# EAGLE board blinkmusb_b1_1side (EAGLE 5.11)
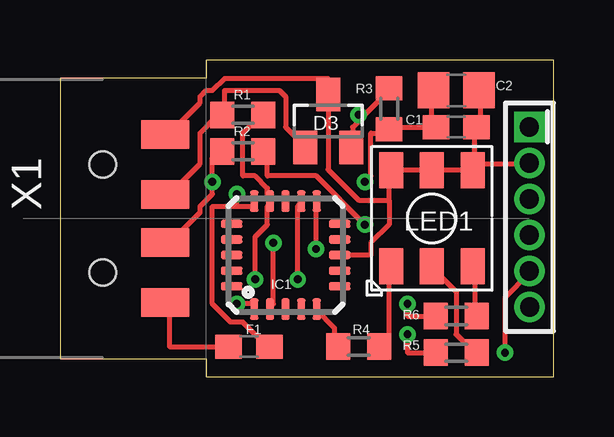
[diagram p0: board, top side]
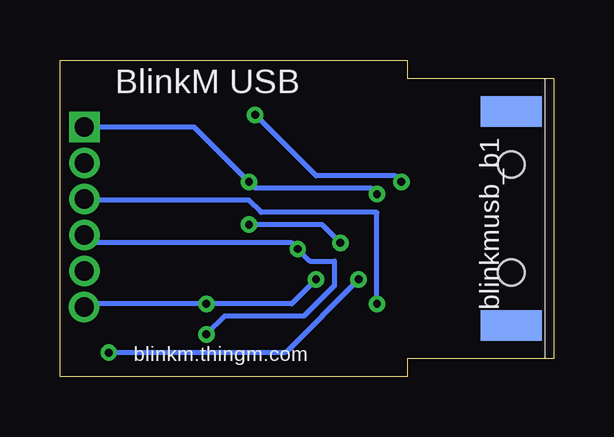
[diagram p1: board, bottom side, seen from below]

Size 20.57 x 13.21 mm. Coordinates in mm from the lower left corner, seen from the top.
Outline: 0,0.76 6.1,0.76 6.1,0 20.57,0 20.57,0.76 20.57,12.45 20.57,13.21 13.72,13.21 6.1,13.21 6.1,12.45 0,12.45 0,0.76
Copper layers (1*16): Top 0.0356mm / dielectric 1.5011mm / Bottom 0.0356mm
Design rules "LaenPCBOrder *": minimum track width 8mil, minimum drill 13mil, track to track 6mil, track to pad 8mil, pad to pad 8mil, via to via 8mil, smd to smd 6mil, copper to edge 15mil, drill to drill 8mil, minimum pad ring 7mil, minimum via ring 7mil, stop-mask expansion 4mil, vias tented up to drill 25mil, thermal gap 10mil
tRestrict: area -6.6,0 to 3.6,12.7
bRestrict: area -6.6,0 to 3.6,12.7

## Footprints (pad centres in the part's own frame; a part is rotated, then mirrored left to right if it is on the bottom)
C0603 = smd 1.1 x 1: 1 -0.85,0; 2 0.85,0
C0805 = smd 1.3 x 1.5: 1 -0.95,0; 2 0.95,0
SOT23 = smd 1 x 1.4: 1 -0.95,-1.1; 2 0.95,-1.1; 3 0,1.1
0603 = smd 1.1 x 1: 1 -0.85,0; 2 0.85,0
MLF20 = smd 0.9 x 0.35: 1 -2.25,1.3; 2 -2.25,0.65; 3 -2.25,0; 4 -2.25,-0.65; 5 -2.25,-1.3; 11 2.25,-1.3; 12 2.25,-0.65; 13 2.25,0; 14 2.25,0.65; 15 2.25,1.3 | smd 0.35 x 0.9: 6 -1.3,-2.25; 7 -0.65,-2.25; 8 0,-2.25; 9 0.65,-2.25; 10 1.3,-2.25; 16 1.3,2.25; 17 0.65,2.25; 18 0,2.25; 19 -0.65,2.25; 20 -1.3,2.25
LED_5050 = smd 1 x 1.5: P$1 1.7,2; P$2 0,2; P$3 -1.7,2; P$4 -1.7,-2; P$5 0,-2; P$6 1.7,-2
R0603 = smd 1 x 1.1: 1 -0.85,0; 2 0.85,0
AVR_MINI_PROG = drill 0.8 pad 1.27 square: 1 0,0 | drill 0.8 pad 1.27 round: 2 1.5,0; 3 3,0; 4 4.5,0; 5 6,0; 6 7.5,0.01
MOLEX-48037-1000 = smd 2 x 1.2: 1 2.6,-3.5; 2 2.6,-1; 3 2.6,1; 4 2.6,3.5 | smd 2.54 x 1.27 bottom: P$1 0,4.45; P$2 0,-4.45 | hole 1.1: 0,2.25; 0,-2.25

## Placement (x,y rotation side)
C1  [C0603]  16.51,10.41 0 top
C2  10uF  [C0805]  16.51,11.94 0 top
D3  [SOT23]  11.18,10.67 0 top
F1  PTC0603  [0603]  7.87,1.27 0 top
IC1  ATTINY45MLF  [MLF20]  9.4,5.08 90 top
LED1  LED_RGB_5050  [LED_5050]  15.49,6.6 180 top
R1  68  [R0603]  7.62,10.92 180 top
R2  68  [R0603]  7.62,9.4 180 top
R3  1k5  [R0603]  13.72,11.18 90 top
R4  100  [R0603]  12.45,1.27 0 top
R5  100  [R0603]  16.51,1.02 0 top
R6  60  [R0603]  16.51,2.54 0 top
U$1  AVR_MINI_PROGSMD  [AVR_MINI_PROG]  19.56,10.41 270 top
X1  USB  [MOLEX-48037-1000]  1.78,6.6 0 top

## Library data of the parts
C1 C2 R1-R6 = rcl
D3 = diode
F1 U$1 = SparkFun-20110517
IC1 LED1 X1 = todstuff

## Nets
BLU: IC1.12 R6.1 U$1.6
D+: IC1.14 R1.1 U$1.5
D-: IC1.2 R2.1
GND: C1.2 C2.2 D3.3 IC1.8 LED1.P$4 LED1.P$5 LED1.P$6 U$1.2 X1.4
GRN: IC1.11 R5.1 U$1.4
RBLU: LED1.P$3 R6.2
RED: IC1.5 R4.1
RGRN: LED1.P$2 R5.2
RRED: LED1.P$1 R4.2
RST: IC1.1 U$1.3
USB_M: D3.2 R2.2 R3.2 X1.2
USB_P: D3.1 R1.2 X1.3
VBUS: F1.1 X1.1
VCC: C1.1 C2.1 F1.2 IC1.15 R3.1 U$1.1

## Tracks (layer width: path | path; a pad name or v marks a point on that pad's centre or on a via)
BLU  (via drill 0.33)
  Top 0.203: v9.91,4.06 9.91,7.11 IC1.12 | v14.48,3.05 14.48,2.54 15.49,2.54 R6.1
  Bottom 0.203: v9.91,4.06 10.92,3.05 v14.48,3.05 19.56,3.05 U$1.6
D+  (via drill 0.33)
  Top 0.203: R1.1 8.38,10.92 7.62,10.16 7.62,8.38 8.13,8.38 8.64,7.87 8.64,7.37 IC1.14 8.64,7.11 8.64,6.35 8.13,5.84 v8.13,4.06 | v18.54,1.02 18.54,3.3 19.56,4.32 U$1.5
  Bottom 0.203: v8.13,4.06 11.18,1.02 v18.54,1.02
D-  (via drill 0.33)
  Top 0.203: v8.89,5.59 8.89,3.05 IC1.2 | v12.7,6.35 10.67,8.38 8.64,8.38 8.64,9.4 R2.1
  Bottom 0.203: v8.89,5.59 9.65,6.35 v12.7,6.35
GND
  Top 0.203: C2.2 17.53,11.94 17.53,10.41 C1.2 17.27,10.41 17.27,8.89 | 13.72,7.37 13.72,8.38 LED1.P$6 13.97,8.64 15.49,8.64 | 13.72,7.37 13.72,6.35 12.95,5.59 12.95,5.08 11.68,5.08 IC1.8 | 13.72,7.37 12.45,7.37 11.18,8.64 11.18,11.68 D3.3 11.18,11.94 11.18,12.45 6.86,12.45 6.35,11.94 6.1,11.94 5.84,11.68 5.84,11.43 4.57,10.16 X1.4 | 15.49,8.64 LED1.P$5 15.49,8.64 | 15.49,8.64 17.02,8.64 LED1.P$4 | 17.27,8.89 17.27,8.64 LED1.P$4 | 17.27,8.89 19.56,8.89 U$1.2 | LED1.P$4 17.27,8.89
GRN  (via drill 0.33)
  Top 0.203: v10.67,5.33 10.67,7.11 IC1.11 | v14.48,1.78 14.48,1.02 15.49,1.02 R5.1
  Bottom 0.203: U$1.4 19.56,5.84 19.3,5.59 10.92,5.59 v10.67,5.33 10.16,4.83 9.14,4.83 9.14,3.81 10.41,2.54 13.72,2.54 v14.48,1.78
RBLU
  Top 0.203: R6.2 17.27,2.54 17.27,4.57 LED1.P$3
RED
  Top 0.203: IC1.5 10.67,2.79 11.43,2.03 11.43,1.27 R4.1
RGRN
  Top 0.203: R5.2 17.27,1.02 16.51,1.78 16.51,3.56 15.49,4.57 LED1.P$2
RRED
  Top 0.203: R4.2 13.46,1.27 13.72,1.52 13.72,4.57 LED1.P$1
RST  (via drill 0.33)
  Top 0.203: v7.37,3.05 8.13,3.05 IC1.1
  Bottom 0.203: v7.37,3.05 7.37,6.86 12.19,6.86 12.7,7.37 19.56,7.37 U$1.3
USB_M  (via drill 0.33)
  Top 0.203: 12.7,10.92 12.19,10.41 12.19,9.65 D3.2 | 12.7,10.92 13.72,11.94 R3.2 | R2.2 6.6,9.4 6.35,9.14 v6.35,8.13 6.35,7.62 5.84,7.11 5.84,6.86 4.57,5.59 X1.2 | v12.45,10.92 12.7,10.92
  Bottom 0.203: v12.45,10.92 9.91,8.38 6.6,8.38 v6.35,8.13
USB_P
  Top 0.203: X1.3 4.57,7.62 5.84,8.89 5.84,10.16 6.6,10.92 R1.2 6.86,10.92 6.86,11.94 9.14,11.94 9.4,11.68 9.4,10.41 10.16,9.65 D3.1
VBUS
  Top 0.203: F1.1 6.86,1.27 4.57,1.27 4.57,3.05 X1.1
VCC  (via drill 0.33)
  Top 0.203: 7.37,7.11 6.35,7.11 6.35,3.05 7.11,2.29 7.62,2.29 8.64,1.27 F1.2 | 7.37,7.11 8.13,7.11 IC1.15 | 15.49,10.41 13.72,10.41 R3.1 13.72,10.16 12.95,10.16 12.95,8.38 v12.7,8.13 | 15.49,10.41 C1.1 15.49,10.41 | 15.49,10.41 15.49,11.94 C2.1 | 7.37,7.11 v7.37,7.62
  Bottom 0.203: U$1.1 14.99,10.41 v12.7,8.13 12.45,7.87 7.62,7.87 v7.37,7.62

## Text on the board
bPlace: BlinkM USB | blinkmusb_b1 | blinkm.thingm.com